# Altium PCB Sinistro_CLK_RevB.PcbDoc (part 5 of 6)
Units mil, origin at the board's own origin, x right, y up, seen from the top; angles counter-clockwise.
Board outline 5905.51 x 4330.71 mil, 10 copper layers (Top Layer (.GTL), MidLayer1 (*.G1), +12V (*.GP1), -12V (*.GP2), A & GND (*.GP3), Chassis E (*.GP4), +28V & VCC (*.GP5), MidLayer2 (*.G2), MidLayer3 (*.G3), Bottom Layer (.GBL)), stack 64.6 mil thick; 495 components, 327 nets, 1939 pads, 938 vias.
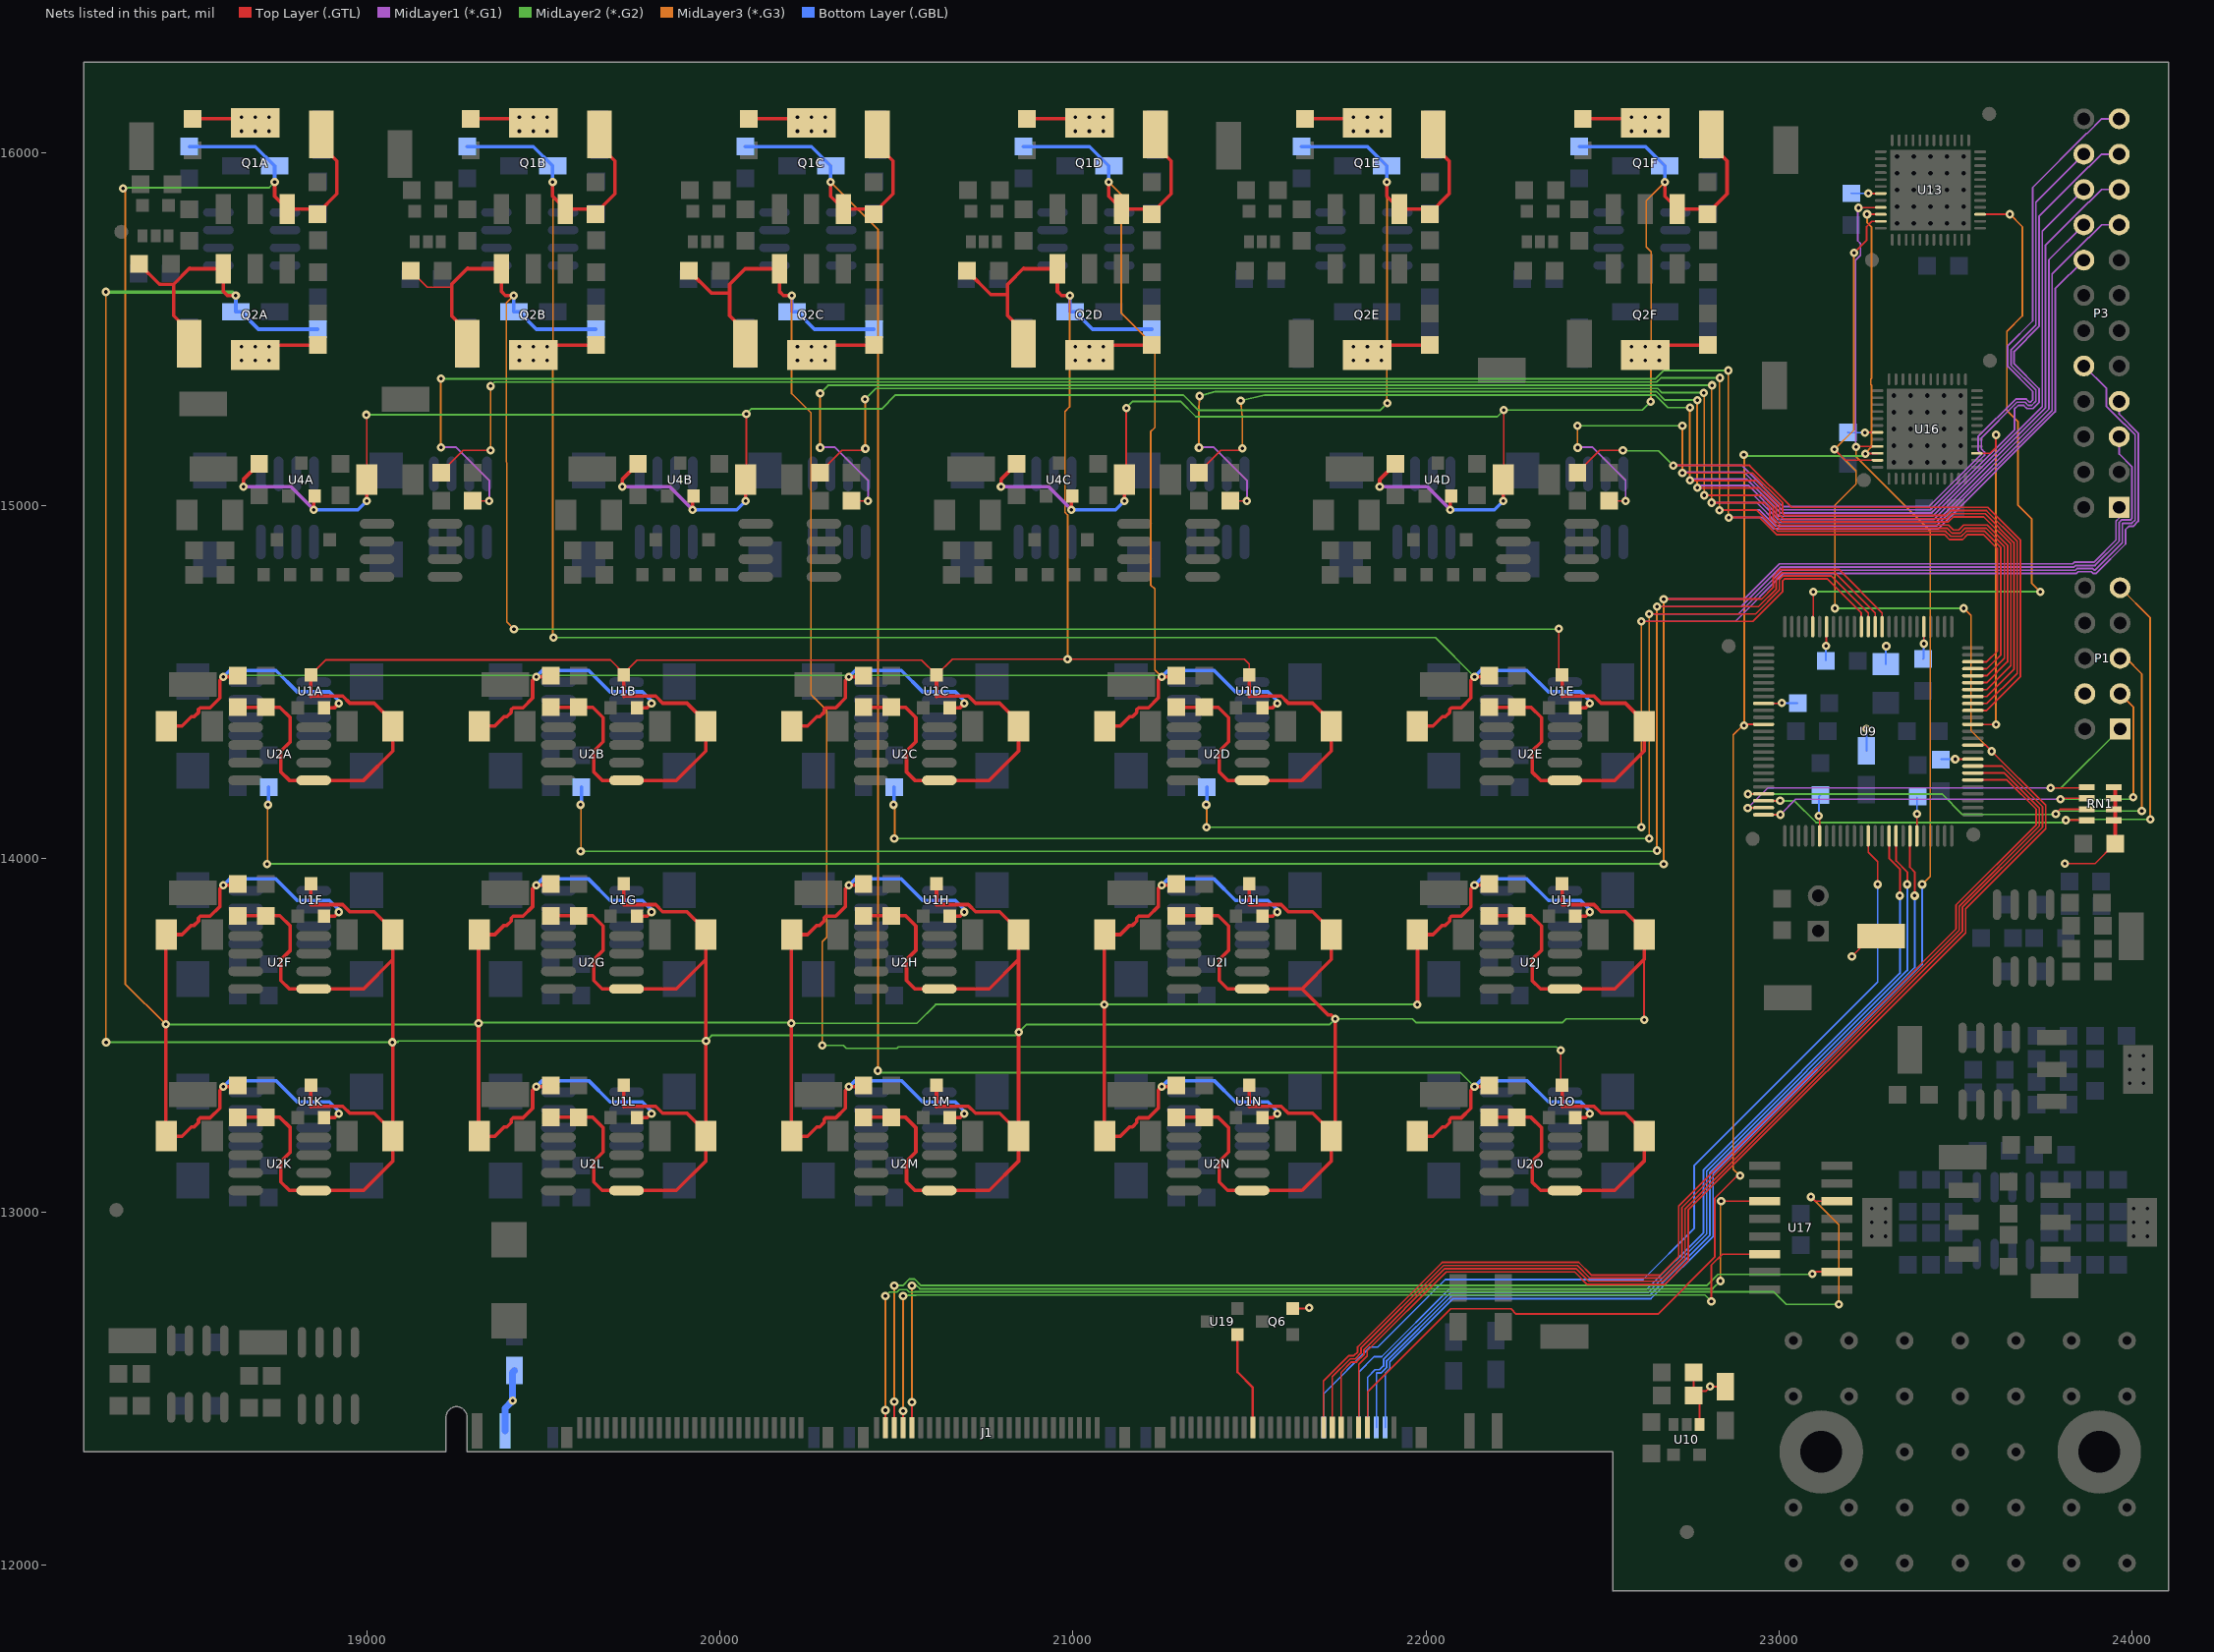
[diagram p13: the nets of this part, all layers, seen from the top]

## Via types
v1: diameter 24, hole 10, Top Layer (.GTL) to Bottom Layer (.GBL), 938 vias

## Nets (pads, with @x,y where several pads share a name; then routed paths per layer and width w, separated by ;. In a path a pad name is that pad's centre, name@x,y a point inside that pad or via, vN(x,y) a via of type N, cw(c..) or ccw(c..) an arc to the next point about the centre after c; other vN are vias at no path point) (continued)
PH_CLK12: P3.1 R1A.1 U9.86 | length 7167.4
  Top Layer (.GTL) w5: v1(22673,14735) 22949.91,14735 22983,14768.09 22983,14797.91 23004.09,14819 23168.78,14819 23291.78,14696 U9.86@23291.78,14656.89 U9.86@23291.78,14686.26
  MidLayer1 (*.G1) w5: v1(22673,14735) 22901.09,14735 23001.09,14835 23831.61,14835 23835.88,14839.27 23890.91,14839.27 23954,14902.36 23954,14955.94 23963,14964.94 P3.1@23963,14995
  MidLayer2 (*.G2) w5: v1(18718,13985) v1(22673,13985) ; v1(18720,14152.42) v1@18726,14152.42
  MidLayer3 (*.G3) w5: v1(18718,13985) 18719,13986 v1@18719,14153 ; v1(22673,13985) v1(22673,14735)
  Bottom Layer (.GBL) w10: v1(18720,14152.42) 18721.94,14154.35 R1A.1@18721.94,14202.44
PH_CLK13: P3.5 R1B.1 U9.87 | length 6416.4
  Top Layer (.GTL) w5: v1(22654,14714) 22941.64,14714 22992,14764.36 22992,14794.18 23007.82,14810 23158.09,14810 23272.09,14696 U9.87@23272.09,14656.89
  MidLayer1 (*.G1) w5: v1(22654,14714) 22892.82,14714 23004.82,14826 23835.34,14826 23839.61,14830.27 23894.64,14830.27 23963,14898.63 23963,14952.21 23969.76,14958.97 23995.22,14958.97 23999.03,14962.78 23999.03,15109.92 23963,15145.95 P3.5@23963,15195
  MidLayer2 (*.G2) w5: v1(19605.83,14152.42) v1@19611.83,14152.42 ; v1(19606,14021) v1@22656.66,14021
  MidLayer3 (*.G3) w5: v1(19606,14021) 19607,14022 v1@19607,14150 ; v1(22654,14022.75) v1(22654,14714)
  Bottom Layer (.GBL) w10: v1(19605.83,14152.42) 19607.76,14154.35 R1B.1@19607.76,14202.44
PH_CLK14: P3.10 R1C.1 U9.88 | length 5710.7
  Top Layer (.GTL) w5: v1(22632,14693) 22933.37,14693 23001,14760.63 23001,14790.46 23011.54,14801 23147.41,14801 23252.41,14696 U9.88@23252.41,14656.89
  MidLayer1 (*.G1) w5: v1(22632,14693) 22884.54,14693 23008.54,14817 23839.07,14817 23843.34,14821.27 23888.1,14821.27 23892.37,14817 23894.1,14817 23972,14894.9 23972,14948.48 23973.49,14949.97 23998.95,14949.97 24008.03,14959.05 24008.03,15200.92 23977.92,15231.03 23976.02,15231.03 23926.97,15280.08 23926.97,15331.03 P3.10@23863,15395
  MidLayer2 (*.G2) w5: v1(20491.65,14152.42) v1@20497.65,14152.42 ; v1(20494,14057) v1(22632,14057)
  MidLayer3 (*.G3) w5: v1(20494,14057) 20495,14058 v1@20495,14153 ; v1(22632,14057) v1(22632,14693)
  Bottom Layer (.GBL) w10: v1(20491.65,14152.42) 20493.59,14154.35 R1C.1@20493.59,14202.44
PH_CLK15: P3.7 R1D.1 U9.89 | length 4624.9
  Top Layer (.GTL) w5: v1(22610,14672) 22925.1,14672 23010,14756.9 23010,14786.73 23015.27,14792 23136.72,14792 23232.72,14696 U9.89@23232.72,14656.89
  MidLayer1 (*.G1) w5: v1(22610,14672) 22876.27,14672 23012.27,14808 23842.79,14808 23847.07,14812.27 23884.37,14812.27 23888.64,14808 23897.82,14808 23981,14891.18 23981,14932.02 23989.95,14940.97 24002.68,14940.97 24017.03,14955.32 24017.03,15204.65 23963,15258.68 P3.7@23963,15295
  MidLayer2 (*.G2) w5: v1(21377.48,14152.42) v1@21383.48,14152.42 ; v1(21378,14089) v1@22609,14089
  MidLayer3 (*.G3) w5: v1(21378,14089) 21379,14090 v1@21379,14160 ; v1(22610,14089) v1(22610,14672)
  Bottom Layer (.GBL) w10: v1(21377.48,14152.42) 21379.42,14154.35 R1D.1@21379.42,14202.44
PH_CLK16: P3.16 R6A.1 U9.73 | length 7268
  Top Layer (.GTL) w5: R6A.1@19300.4,15013.31 19300.71,15013 v1(19347,15013) ; v1@22858,14968 22860,14966 22944.9,14966 22992.9,14918 23467.91,14918 23482.15,14903.76 23519.85,14903.76 23534.09,14918 23578.46,14918 23618,14878.46 23618,14587.48 23588,14557.48 U9.73@23548.67,14557.48
  Top Layer (.GTL) w10: v1(19210,15165) v1@19210.4,15164.6
  MidLayer1 (*.G1) w5: v1(19210,15165) 19253,15165 19347,15071 v1(19347,15013) ; v1(22857,14966) 22952.9,14966 22984.9,14934 23450.26,14934 23781.97,15265.71 23781.97,15613.97 P3.16@23863,15695
  MidLayer2 (*.G2) w5: v1(19210,15359) 22650,15359 22673.49,15382.49 v1(22856,15382.49)
  MidLayer3 (*.G3) w5: v1(19210,15165) v1(19210,15359) ; v1(22856,15382.49) 22856,14967 v1(22857,14966)
PH_CLK17: P3.17 R3A.1 U9.72 | length 7196.5
  Top Layer (.GTL) w5: R3A.1@19210.4,15093.31 19273.09,15156 v1(19351,15156) ; v1@22831,14989 22833,14987 22936.63,14987 22996.63,14927 23471.64,14927 23485.88,14912.76 23516.12,14912.76 23530.36,14927 23582.18,14927 23628,14881.18 23628,14577.8 23588,14537.8 U9.72@23548.67,14537.8
  MidLayer1 (*.G1) w5: v1(22831,14987) 22944.63,14987 22988.63,14943 23446.53,14943 23772.97,15269.44 23772.97,15655.92 23876.02,15758.97 23877.92,15758.97 23913.95,15795 P3.17@23963,15795
  MidLayer2 (*.G2) w5: v1(19351,15338) 19362.49,15349.49 22653.22,15349.49 22665.22,15361.49 v1(22832,15361.49)
  MidLayer3 (*.G3) w5: v1(19351,15156) v1(19351,15338) ; v1(22831,14987) 22831,15360.49 v1(22832,15361.49)
PH_CLK18: P3.18 R6B.1 U9.71 | length 6314.9
  Top Layer (.GTL) w5: R6B.1@20373.24,15013.31 20373.54,15013 v1(20419.83,15013) ; v1@22809,15010 22811,15008 22958.18,15008 22974,14992.18 22974,14962.36 23000.36,14936 23475.37,14936 23489.61,14921.76 23512.39,14921.76 23526.63,14936 23585.91,14936 23638,14883.91 23638,14568.11 23588,14518.11 U9.71@23548.67,14518.11
  Top Layer (.GTL) w10: v1@20282.83,15165 v1@20283.24,15164.6 ; v1@20283.24,15163.24 v1(20284,15164)
  MidLayer1 (*.G1) w5: v1@20282.83,15165 20325.83,15165 20419.83,15071 v1(20419.83,15013) ; v1(22809,15008) 22936.36,15008 22992.36,14952 23442.8,14952 23763.97,15273.17 23763.97,15695.97 P3.18@23863,15795
  MidLayer2 (*.G2) w5: v1(20284,15318) 20306.49,15340.49 v1(22810,15340.49)
  MidLayer3 (*.G3) w5: v1(20284,15164) v1(20284,15318) ; v1(22809,15008) 22809,15339.49 v1(22810,15340.49)
PH_CLK19: P3.19 R3B.1 U9.70 | length 6241
  Top Layer (.GTL) w5: R3B.1@20283.24,15093.31 20345.93,15156 v1@20412,15156 ; v1@22788,15030 22789,15029 22949.91,15029 22983,14995.91 22983,14966.09 23004.09,14945 23479.1,14945 23493.34,14930.76 23508.66,14930.76 23522.9,14945 23589.64,14945 23647,14887.64 23647,14557.43 23588,14498.43 U9.70@23548.67,14498.43
  MidLayer1 (*.G1) w5: v1(22788,15029) 22928.09,15029 22996.09,14961 23439.07,14961 23754,15275.93 23754,15736.95 23876.02,15858.97 23877.92,15858.97 23913.95,15895 P3.19@23963,15895
  MidLayer2 (*.G2) w5: v1(20411,15301) 20441.49,15331.49 22656.46,15331.49 22668.46,15319.49 v1(22787,15319.49) v1@22788,15319.49
  MidLayer3 (*.G3) w5: v1(20411,15301) 20412,15300 v1(20412,15161) ; v1(22787,15319.49) 22788,15318.49 v1(22788,15029)
PH_CLK20: P3.20 R6C.1 U9.69 | length 5373.9
  Top Layer (.GTL) w5: R6C.1@21446.07,15013.31 21446.38,15013 v1(21492.67,15013) ; v1(22768,15050) 22941.64,15050 22992,14999.64 22992,14969.82 23007.82,14954 23479.58,14954 23493.34,14967.76 23579.61,14967.76 23656,14891.37 23656,14546.74 23588,14478.74 U9.69@23548.67,14478.74
  Top Layer (.GTL) w10: v1@21355.67,15165 v1@21356.07,15164.6 ; v1@21356.07,15163.24 v1(21356.83,15164)
  MidLayer1 (*.G1) w5: v1@21355.67,15165 21398.67,15165 21492.67,15071 v1(21492.67,15013) ; v1(22768,15050) 22774.91,15056.91 22912.91,15056.91 22999.82,14970 23435.35,14970 23745,15279.65 23745,15777 P3.20@23863,15895
  MidLayer2 (*.G2) w5: v1(21358.55,15309.89) 21402.49,15322.49 22652.73,15322.49 22676.73,15298.49 v1(22768,15298.49)
  MidLayer3 (*.G3) w5: v1@21357,15159 21357,15275 v1(21358.55,15309.89) ; v1(22768,15050) v1(22768,15298.49)
PH_CLK21: P3.21 R3C.1 U9.68 | length 5397.5
  Top Layer (.GTL) w5: R3C.1@21356.07,15093.31 21418.76,15156 21474,15156 v1(21480,15162) ; v1(22747,15071) 22933.37,15071 23001,15003.37 23001,14973.54 23011.54,14963 23475.85,14963 23489.61,14976.76 23583.33,14976.76 23665,14895.1 23665,14536.06 23588,14459.06 U9.68@23548.67,14459.06
  MidLayer1 (*.G1) w5: v1(22747,15071) 22751.5,15075.5 22907.04,15075.5 23003.54,14979 23431.62,14979 23666.5,15213.88 23666.5,15272.66 23677.34,15283.5 23692.66,15283.5 23701.66,15274.5 23719.23,15274.5 23736,15291.27 23736,15330.84 23665.5,15401.34 23665.5,15436.5 23736,15507 23736,15818.95 23876.02,15958.97 23877.92,15958.97 23913.95,15995 P3.21@23963,15995
  MidLayer2 (*.G2) w5: v1(21475,15297) 21542.49,15312.49 22650,15312.49 22685,15277.49 v1(22747,15277.49)
  MidLayer3 (*.G3) w5: v1(21475,15297) 21480,15250 v1(21480,15162) ; v1(22747,15071) v1(22747,15277.49)
PH_CLK22: P3.22 R6D.1 U9.67 | length 4411.6
  Top Layer (.GTL) w5: R6D.1@22518.91,15013.31 22519.21,15013 v1(22565.5,15013) ; v1(22726,15092.5) 22924.6,15092.5 23010,15007.1 23010,14977.27 23015.27,14972 23472.12,14972 23485.88,14985.76 23587.06,14985.76 23674,14898.82 23674,14525 23588.37,14439.37 U9.67@23548.67,14439.37
  Top Layer (.GTL) w10: v1@22428.5,15165 v1@22428.91,15164.6 ; v1@22428.91,15163.24 v1(22429.67,15164)
  MidLayer1 (*.G1) w5: v1@22428.5,15165 22471.5,15165 22565.5,15071 v1(22565.5,15013) ; v1(22726,15092.5) 22727.91,15094.41 22900.86,15094.41 23007.27,14988 23427.89,14988 23581.5,15141.61 23581.5,15151.34 23572.5,15160.34 23572.5,15191.39 23673.61,15292.5 23696.39,15292.5 23705.39,15283.5 23715.23,15283.5 23726.73,15295 23727,15295 23727,15327.11 23656.5,15397.61 23656.5,15440.23 23727,15510.73 23727,15859 P3.22@23863,15995
  MidLayer2 (*.G2) w5: v1(22429,15226) v1(22726,15226)
  MidLayer3 (*.G3) w5: v1@22429,15156 v1(22429,15226) ; v1(22726,15092.5) v1(22726,15226)
PH_CLK23: P3.23 R3D.1 U9.66 | length 4175.1
  Top Layer (.GTL) w5: R3D.1@22428.91,15093.31 22491.6,15156 v1(22557.67,15156) ; v1(22700,15113.5) 22916.32,15113.5 23035.06,14994.76 23590.79,14994.76 23683,14902.55 23683,14515 23587.69,14419.69 U9.66@23548.67,14419.69
  MidLayer1 (*.G1) w5: v1(22700,15113.5) 22894.5,15113.5 23011,14997 23424.16,14997 23572.5,15145.34 23572.5,15147.61 23563.5,15156.61 23563.5,15195.12 23669.88,15301.5 23700.12,15301.5 23709.12,15292.5 23711.5,15292.5 23718,15299 23718,15323.38 23647.5,15393.88 23647.5,15452.5 23718,15523 23718,15900.95 23870.55,16053.5 23872.45,16053.5 23913.95,16095 P3.23@23963,16095
  MidLayer2 (*.G2) w5: v1@22555,15155 22658.5,15155 v1(22700,15113.5)
Q1_CA: Q1A.4 R12A.1 | length 165.6
  Top Layer (.GTL) w10: R12A.1@18507.13,16095.32 Q1A.4@18672.76,16095.32
Q1_CB: Q1B.4 R12B.1 | length 165.6
  Top Layer (.GTL) w10: R12B.1@19294.54,16095.32 Q1B.4@19460.17,16095.32
Q1_CC: Q1C.4 R12C.1 | length 165.6
  Top Layer (.GTL) w10: R12C.1@20081.94,16095.32 Q1C.4@20247.57,16095.32
Q1_CD: Q1D.4 R12D.1 | length 165.6
  Top Layer (.GTL) w10: R12D.1@20869.34,16095.32 Q1D.4@21034.97,16095.32
Q1_CE: Q1E.4 R12E.1 | length 165.6
  Top Layer (.GTL) w10: R12E.1@21656.74,16095.32 Q1E.4@21822.37,16095.32
Q1_CF: Q1F.4 R12F.1 | length 165.6
  Top Layer (.GTL) w10: R12F.1@22444.14,16095.32 Q1F.4@22609.77,16095.32
Q2_CA: Q2A.4 R20A.2 | length 149.3
  Top Layer (.GTL) w10: Q2A.4@18712.13,15454.13 R20A.2@18861.46,15454.13
Q2_CB: Q2B.4 R20B.2 | length 149.3
  Top Layer (.GTL) w10: Q2B.4@19499.53,15454.13 R20B.2@19648.87,15454.13
Q2_CC: Q2C.4 R20C.2 | length 149.3
  Top Layer (.GTL) w10: Q2C.4@20286.94,15454.13 R20C.2@20436.27,15454.13
Q2_CD: Q2D.4 R20D.2 | length 149.3
  Top Layer (.GTL) w10: Q2D.4@21074.34,15454.13 R20D.2@21223.67,15454.13
Q2_CE: Q2E.4 R20E.2 | length 149.3
  Top Layer (.GTL) w10: Q2E.4@21861.74,15454.13 R20E.2@22011.07,15454.13
Q2_CF: Q2F.4 R20F.2 | length 149.3
  Top Layer (.GTL) w10: Q2F.4@22649.14,15454.13 R20F.2@22798.47,15454.13
RESET_N: J1.6 U9.44 | length 2650.8
  Top Layer (.GTL) w5: U9.44@23368.41,14062.26 U9.44@23370.52,14064.37 23370.52,13975.48 23384,13962 v1(23384,13895)
  Bottom Layer (.GBL) w5: J1.6@21859.5,12389.15 21859.5,12543.34 21859.66,12543.5 21872.39,12543.5 21888.5,12559.61 21888.5,12578.23 22073.27,12763 22633.27,12763 22804,12933.73 22804,13111.73 23384,13691.73 v1(23384,13895)
RG: J1.17 U9.56 | length 3221.4
  Top Layer (.GTL) w5: J1.17@21709.5,12389.15 21709.5,12520.46 21781.54,12592.5 21795.66,12592.5 21806.5,12603.34 21806.5,12617.46 22045.91,12856.87 22432.32,12856.87 22468.18,12821 22512,12821 22663.8,12821 22715.5,12872.7 22715.5,13015.68 23501,13801.18 23501,13869.18 23728,14096.18 23728,14139.82 23644.98,14222.84 U9.56@23548.67,14222.84
S1: J1.8 U9.42 | length 2657
  Top Layer (.GTL) w5: U9.42@23331.15,14064.37 23331.15,13993.85 23363,13962 v1(23363,13927)
  Bottom Layer (.GBL) w5: J1.8@21834.5,12389.15 21834.5,12531.07 21855.94,12552.5 21868.66,12552.5 21879.5,12563.34 21879.5,12581.96 22069.54,12772 22629.54,12772 22795,12937.46 22795,13115.46 23363,13683.46 v1(23363,13927)
S2: J1.10 U9.41 | length 2663
  Top Layer (.GTL) w5: U9.41@23311.46,14064.37 23311.46,14000.81 23342,13970.27 v1(23342,13895)
  Bottom Layer (.GBL) w5: J1.10@21809.5,12389.15 21809.5,12545.67 21853.34,12589.5 21874.32,12589.5 22065.82,12781 22625.82,12781 22786,12941.18 22786,13119.18 23342,13675.18 v1(23342,13895)
S3: J1.13 U9.58 | length 3246.8
  Top Layer (.GTL) w5: J1.13@21759.5,12389.15 21759.5,12545.01 21789,12574.5 21803.12,12574.5 21824.5,12595.88 21824.5,12610 22053.37,12838.87 22424.86,12838.87 22460.73,12803 22512,12803 22671.26,12803 22733.5,12865.24 22733.5,13008.23 23519,13793.73 23519,13861.73 23746,14088.73 23746,14147.27 23631.07,14262.21 U9.58@23548.67,14262.21
S_WIRED_1: J1.33 U19.1 | length 280.9
  Top Layer (.GTL) w7: U19.1@21466,12652 21466,12546 21509.5,12502.5 J1.33@21509.5,12389.15
SCLK: J1.7 U9.12 U13.10 U16.10 | length 4754.7
  Top Layer (.GTL) w5: J1.7@21834.5,12389.15 21834.5,12490.07 22069.44,12725 22240.56,12725 22255.22,12710.34 22656.61,12710.34 22817.5,12871.23 22817.5,13037.66 22881.84,13102 v1(22889,13102) ; v1(22901,14377) 22904.32,14380.32 U9.12@22956.15,14380.32 ; v1(23244,15147) 23277.89,15147 U16.10@23278.74,15147.85 ; v1(23249,15825) 23249.41,15824.59 U13.10@23287.74,15824.59
  MidLayer2 (*.G2) w5: v1(22900,15144) 22903.5,15140.5 23237.5,15140.5 v1(23244,15147)
  MidLayer3 (*.G3) w5: v1(22889,13102) 22870,13121 22870,14350 22897,14377 v1(22901,14377) 22901,15143 v1(22900,15144) ; v1(23244,15147) 23244,15148 23261.5,15165.5 23261.5,15340.34 23259.5,15342.34 23259.5,15357.66 23261.5,15359.66 23261.5,15789.5 23249,15802 v1(23249,15825)
SEL_MAX1_N: U9.96 U13.27 | length 1968.4
  Top Layer (.GTL) w5: U9.96@23094.93,14656.89 23097,14658.96 v1(23097,14756) ; U13.27@23569.24,15824.59 23652.59,15824.59 v1(23653,15825)
  MidLayer2 (*.G2) w5: v1(23097,14756) v1(23740,14756)
  MidLayer3 (*.G3) w5: v1(23653,15825) 23688.96,15789.04 23688.96,15536.96 23645,15493 23645,15269 23676,15238 23676,15001.27 23715,14962.27 23715,14781 v1(23740,14756)
SEL_MAX2_N: U9.64 U16.27 | length 981.4
  Top Layer (.GTL) w5: U9.64@23548.67,14380.32 23548.98,14380 v1(23614,14380) ; U16.27@23560.24,15147.85 23597.01,15147.85 23614,15164.84 v1(23614,15200)
  MidLayer3 (*.G3) w5: v1(23614,14380) v1(23614,15200)
SG: J1.15 U9.57 | length 3234.1
  Top Layer (.GTL) w5: J1.15@21734.5,12389.15 21734.5,12532.73 21785.27,12583.5 21799.39,12583.5 21815.5,12599.61 21815.5,12613.73 22049.64,12847.87 22428.59,12847.87 22464.46,12812 22512,12812 22667.53,12812 22724.5,12868.97 22724.5,13011.96 23510,13797.46 23510,13865.46 23737,14092.46 23737,14143.54 23638.02,14242.52 U9.57@23548.67,14242.52
SIMO: J1.9 U9.61 U13.11 U16.11 | length 5409.2
  Top Layer (.GTL) w5: J1.9@21809.5,12389.15 21809.5,12568.16 21833.5,12592.15 21833.5,12606.27 22057.09,12829.87 22421.13,12829.87 22457,12794 22512,12794 22674.99,12794 22742.5,12861.51 22742.5,13004.5 23528,13790 23528,13858 23755,14085 23755,14151 v1(23602,14304) 23584.74,14321.26 U9.61@23548.67,14321.26 ; v1(23157,15159) 23187.83,15128.17 U16.11@23278.74,15128.17 ; v1(23212,15716) 23248,15752 23248,15790 23262.91,15804.91 U13.11@23287.74,15804.91
  MidLayer2 (*.G2) w5: v1(23158,14709) v1(23523,14709)
  MidLayer3 (*.G3) w5: v1(23158,14709) 23158,15001 23218,15061 23218,15098 v1(23157,15159) 23212,15214 v1(23212,15716) ; v1(23523,14709) 23543.5,14688.5 23543.5,14362.5 v1(23602,14304)
SOMI: J1.4 U13.9 U16.9 | length 4650.8
  Top Layer (.GTL) w5: v1@23218.54,15167.54 U16.9@23278.74,15167.54 ; v1(23225.16,15843) 23225.66,15843.5 23286.97,15843.5 U13.9@23287.74,15844.28
  MidLayer1 (*.G1) w5: v1@23216.5,15167.5 23216.5,15694.34 23230.5,15708.34 23230.5,15742 23222.73,15749.77 23222.73,15835.23 v1@23230.5,15843 ; v1(23225.16,15843) 23229.16,15847 23230,15847 v1@23230.5,15846.5
  MidLayer2 (*.G2) w5: v1@23224.16,15844 v1(23225.16,15843)
  MidLayer3 (*.G3) w5: v1(23218,15166) 23218,15138.48 23427.91,14928.57 23427.91,13949.91 23420,13942 v1(23405,13927)
  Bottom Layer (.GBL) w5: J1.4@21884.5,12389.15 21884.5,12542.89 21897.5,12555.88 21897.5,12574.5 22077,12754 22637,12754 22813,12930 22813,13108 23405,13700 v1(23405,13927)
TCK: P1.1 RN1.1 U9.24 | length 1292.4
  Top Layer (.GTL) w5: v1(22911,14143) 22912.1,14144.1 U9.24@22956.15,14144.1 ; v1(23769,14200) RN1.1@23868.23,14200
  MidLayer1 (*.G1) w5: v1(22911,14143) 22968,14200 v1(23769,14200)
  MidLayer2 (*.G2) w5: v1(23769,14200) 23798.47,14200 P1.1@23965.72,14367.24
TDI: P1.9 RN1.7 U9.23 | length 1874.1
  Top Layer (.GTL) w5: U9.23@22956.15,14163.78 v1(23002.78,14163.78) v1@23003,14164 ; v1(23812,14109) RN1.7@23870.16,14109
  MidLayer2 (*.G2) w5: v1(23002.78,14163.78) 23043.1,14163.78 23104.75,14102.13 23805.13,14102.13 v1(23812,14109) 23814,14111 v1(24051,14111)
  MidLayer3 (*.G3) w5: P1.9@23965.72,14767.24 24051,14681.96 v1(24051,14111)
TDO: P1.3 RN1.3 U9.25 | length 1451.9
  Top Layer (.GTL) w5: U9.25@22956.15,14124.41 v1(23003.59,14124.41) v1@23004,14124 ; v1(23797,14168) 23800.21,14171.21 RN1.3@23870.94,14171.21
  MidLayer1 (*.G1) w5: v1(23003.59,14124.41) 23047.18,14168 v1(23797,14168)
  MidLayer2 (*.G2) w5: v1(23797,14168) 23997,14168 v1(24003,14174)
  MidLayer3 (*.G3) w5: v1(23965.72,14467.24) 24003,14429.96 v1(24003,14174)
TG: J1.18 U9.38 | length 2676.7
  Top Layer (.GTL) w5: U9.38@23252.41,14064.37 23252.41,14017.58 23279,13990.99 v1(23279,13927)
  Bottom Layer (.GBL) w5: J1.18@21709.5,12389.15 21709.5,12483.85 21842.15,12616.5 21863.13,12616.5 22054.63,12808 22614.63,12808 22759,12952.37 22759,13130.37 23279,13650.37 v1(23279,13927)
TMS: P1.5 RN1.5 U9.22 | length 1749.3
  Top Layer (.GTL) w5: v1(22912,14183) 22912.47,14183.47 U9.22@22956.15,14183.47 ; v1(23783,14127) 23795.72,14139.72 RN1.5@23870.94,14139.72
  MidLayer2 (*.G2) w5: v1(22912,14183) 23461,14183 23519,14125 23782,14125 v1(23784,14127) 23792,14135 v1(24027,14135)
  MidLayer3 (*.G3) w5: v1(23783,14127) v1(23784,14127) ; P1.5@23965.72,14567.24 23982.76,14567.24 24027,14523 v1(24027,14135)
VCC: C7.1 C12.2 C16.2 C17.2 C18.2 C19.2 C20.2 C21.2 C23.2 C24.2 C32.1 C34.2 C36.2 C55.1 J1.PC06 L5.2 P1.4 Q6.2 RN1.2 RN1.4 RN1.6 RN1.8 TP19.1 U9.9 U9.31 U9.45 U9.59 U9.80 U9.94 U10.1 U13.7 U16.7 | length 1823.3
  Top Layer (.GTL) w5: Q6.2@21622,12726 21667,12726 v1(21669,12728) ; C12.2@22758,12545 C16.2@22758,12489 ; U10.1@22775,12398 22775,12463 C16.2@22758,12480 C16.2@22758,12489 ; C7.1@22848,12505 v1(22805,12505) 22792,12492 22761,12492 C16.2@22758,12489 ; U9.9@22956.15,14439.37 23006.15,14439.37 v1(23007.41,14440.63) ; v1(23112.41,14120.63) 23114.61,14118.42 U9.31@23114.61,14064.37 ; v1(23133.41,14602.63) U9.94@23133.41,14656 ; v1(23206,13723) 23291,13808 TP19.1@23300,13808 ; v1(23243,15206.26) 23243.65,15206.91 U16.7@23278.74,15206.91 ; v1(23253,15884) 23253.35,15883.65 U13.7@23287.74,15883.65 ; U9.45@23390.2,14064.37 23390.2,14126.43 v1(23390.41,14126.63) ; v1(23409.41,14608.63) 23409.89,14609.11 U9.80@23409.89,14656.89 ; v1(23498.41,14281.63) 23498.67,14281.89 U9.59@23548.67,14281.89 ; v1(23809,13986) 23894.84,13986 23951.55,14042.71 C17.2@23952,14042.71
  Top Layer (.GTL) w10: RN1.2@23947.71,14202.71 23952,14198.42 C17.2@23952,14042.71
  Bottom Layer (.GBL) w5: v1(23007.41,14440.63) C19.2@23052.41,14440.63 ; v1(23112.41,14120.63) 23112.41,14175.63 C18.2@23117.41,14180.63 ; C23.2@23132.41,14560.63 23132.41,14601.63 v1(23133.41,14602.63) ; C36.2@23195,15207.26 23196,15206.26 v1(23243,15206.26) ; C34.2@23204,15884 v1(23253,15884) ; C32.1@23247.41,14305.63 v1(23247.41,14367.63) ; L5.2@23302.41,14550.63 23302.41,14600.63 v1(23303.41,14601.63) ; v1(23390.41,14126.63) C20.2@23390.41,14173.63 ; C21.2@23407.41,14565.63 23409.41,14567.63 v1(23409.41,14608.63) ; C24.2@23458.41,14281.63 v1(23498.41,14281.63)
  Bottom Layer (.GBL) w20: J1.PC06@19391.5,12379.15 19391.5,12443.5 v1(19413,12465) 19413,12545 C55.1@19418,12550
VDD: J1.101 U17.14 | length 3513.6
  Top Layer (.GTL) w5: v1(20469,12438) 20469.16,12437.84 J1.101@20469.16,12388.09 ; v1(23090,13042) 23102,13030 U17.14@23163.67,13030
  MidLayer2 (*.G2) w5: v1(20469,12761) 20480.5,12772.5 20501.66,12772.5 20508.66,12779.5 20529.34,12779.5 20536.34,12772.5 20551.66,12772.5 20552.16,12773 22985,12773 23020,12738 v1(23169,12738)
  MidLayer3 (*.G3) w5: v1(20469,12438) v1(20469,12761) ; v1(23090,13042) 23169,12963 v1(23169,12738)
VOD: J1.95 U17.3 | length 3055.6
  Top Layer (.GTL) w5: v1(20544,12461) 20544.16,12460.84 J1.95@20544.16,12388.09 ; v1(22836,13030) U17.3@22958.95,13030
  MidLayer2 (*.G2) w5: v1(20544,12791) 20557.44,12791 20566.44,12782 22812,12782 v1(22834,12804)
  MidLayer3 (*.G3) w5: v1(20544,12461) v1(20544,12791) ; v1(22834,12804) 22834,13028 v1(22836,13030)
VOG: J1.99 U17.10 | length 3104.1
  Top Layer (.GTL) w5: v1(20494,12462) 20494.16,12461.84 J1.99@20494.16,12388.09 ; v1(23094,12824) 23100,12830 U17.10@23163.67,12830
  MidLayer2 (*.G2) w5: v1(20494,12791) 20517.84,12791 20536.34,12809.5 20551.66,12809.5 20570.16,12791 22794.84,12791 22826.34,12822.5 23092.5,12822.5 v1(23094,12824)
  MidLayer3 (*.G3) w5: v1(20494,12462) v1(20494,12791)
VRD: J1.97 U17.6 | length 2937.5
  Top Layer (.GTL) w5: v1(20519,12436) 20519.16,12435.84 J1.97@20519.16,12388.09 ; v1(22808,12746) 22808,12849 22839,12880 U17.6@22958.95,12880
  MidLayer2 (*.G2) w5: v1(20519,12761) 20521.5,12763.5 20555.39,12763.5 20555.89,12764 22790,12764 v1(22808,12746)
  MidLayer3 (*.G3) w5: v1(20519,12436) v1(20519,12761)
VREFHI1: C4F.2 C4G.2 C4H.2 C4I.2 C4J.2 C4K.2 C4L.2 C4M.2 C4N.2 C13A.1 L1F.1 L1G.1 L1H.1 L1I.1 L1J.1 L1K.1 L1L.1 L1M.1 L1N.1 Q1A.3 R7A.2 R13A.2 TP1A.1 U1F.2 U1G.2 U1H.2 U1I.2 U1J.2 U1K.2 U1L.2 U1M.2 U1N.2 | length 16155.3
  Top Layer (.GTL) w10: L1F.1@18430.87,13783.18 v1(18430.87,13530.49) 18430.87,13215.63 L1K.1@18432.53,13213.98 18476.8,13213.98 18503.12,13240.3 18511.19,13240.3 18523.53,13252.63 18523.53,13260.7 18528.8,13265.98 18556.49,13265.98 18583.87,13293.36 18583.87,13343.66 v1(18594.04,13353.82) ; L1F.1@18430.87,13786.5 18432.53,13784.84 18476.8,13784.84 18503.12,13811.16 18511.19,13811.16 18523.53,13823.5 18523.53,13831.57 18528.8,13836.84 18556.49,13836.84 18583.87,13864.22 18583.87,13914.52 v1@18593.98,13924.64 ; v1(18594.04,13353.82) v1(18594.04,13353.82) ; v1(18594.04,13924.69) v1@18593.98,13924.64 ; C4K.2@18635.32,13357.4 18631.69,13353.77 v1(18594.04,13353.82) ; C4F.2@18635.32,13928.27 18631.69,13924.64 v1@18593.98,13924.64 ; v1(18739.3,15915.59) 18739.3,15875.24 Q1A.3@18774.85,15839.68 18849.93,15839.69 18861.46,15828.15 18915.6,15882.28 18915.6,15975.51 18871.31,16019.8 TP1A.1@18871.31,16050.32 ; U1K.2@18879.42,13266.14 18908.94,13266.14 v1(18920.76,13277.95) ; U1F.2@18879.42,13837.01 18908.94,13837.01 v1(18920.76,13848.82) ; L1G.1@19316.7,13783.18 v1(19316.7,13534) 19316.7,13215.63 L1L.1@19318.35,13213.98 19362.63,13213.98 19388.95,13240.3 19397.02,13240.3 19409.35,13252.63 19409.35,13260.7 19414.63,13265.98 19442.31,13265.98 19469.7,13293.36 19469.7,13343.66 v1(19479.86,13353.82) ; L1G.1@19316.7,13786.5 19318.35,13784.84 19362.63,13784.84 19388.95,13811.16 19397.02,13811.16 19409.35,13823.5 19409.35,13831.57 19414.63,13836.84 19442.31,13836.84 19469.7,13864.22 19469.7,13914.52 v1@19479.81,13924.64 ; v1(19479.86,13353.82) v1(19479.86,13353.82) ; v1(19479.86,13924.69) v1@19479.81,13924.64 ; C4L.2@19521.15,13357.4 19517.52,13353.77 v1(19479.86,13353.82) ; C4G.2@19521.15,13928.27 19517.52,13924.64 v1@19479.81,13924.64 ; U1L.2@19765.24,13266.14 19794.77,13266.14 v1(19806.58,13277.95) ; U1G.2@19765.24,13837.01 19794.77,13837.01 v1(19806.58,13848.82) ; L1H.1@20202.52,13783.18 v1(20202.52,13534) 20202.52,13215.63 L1M.1@20204.18,13213.98 20248.45,13213.98 20274.78,13240.3 20282.85,13240.3 20295.18,13252.63 20295.18,13260.7 20300.45,13265.98 20328.14,13265.98 20355.52,13293.36 20355.52,13343.66 v1@20365.64,13353.77 ; L1H.1@20202.52,13786.5 20204.18,13784.84 20248.45,13784.84 20274.78,13811.16 20282.85,13811.16 20295.18,13823.5 20295.18,13831.57 20300.45,13836.84 20328.14,13836.84 20355.52,13864.22 20355.52,13914.52 v1@20365.64,13924.64 ; v1(20365.69,13353.82) v1@20365.64,13353.77 ; v1(20365.69,13924.69) v1@20365.64,13924.64 ; C4M.2@20406.98,13357.4 20403.35,13353.77 v1@20365.64,13353.77 ; C4H.2@20406.98,13928.27 20403.35,13924.64 v1@20365.64,13924.64 ; U1M.2@20651.07,13266.14 20680.6,13266.14 v1(20692.41,13277.95) ; U1H.2@20651.07,13837.01 20680.6,13837.01 v1(20692.41,13848.82) ; v1(21251.52,13353.82) v1@21251.46,13353.77 ; v1(21251.52,13924.69) v1@21251.46,13924.64 ; C4N.2@21292.8,13357.4 21289.17,13353.77 v1@21251.46,13353.77 ; C4I.2@21292.8,13928.27 21289.17,13924.64 v1@21251.46,13924.64 ; U1N.2@21536.9,13266.14 21566.42,13266.14 v1(21578.24,13277.95) ; U1I.2@21536.9,13837.01 21566.42,13837.01 v1(21578.24,13848.82) ; L1J.1@21974.18,13786.5 L1J.1@21975.84,13784.84 ; v1(21975,13587) 21975.84,13587.84 L1J.1@21975.84,13784.84 ; v1(22137.34,13924.69) v1@22137.29,13924.64 ; C4J.2@22178.63,13928.27 22175,13924.64 v1@22137.29,13924.64 ; U1J.2@22422.72,13837.01 22452.25,13837.01 v1(22464.06,13848.82) ; v1@21251.46,13353.77 21241.35,13343.66 21241.35,13293.36 21213.97,13265.98 21186.28,13265.98 21181.01,13260.7 21181.01,13252.63 21168.67,13240.3 21160.6,13240.3 21134.28,13213.98 L1N.1@21090.01,13213.98 21088.35,13215.63 21088.35,13784.84 21088.35,13786.5 21090.01,13784.84 21134.28,13784.84 21160.6,13811.16 21168.67,13811.16 21181.01,13823.5 21181.01,13831.57 21186.28,13836.84 21213.97,13836.84 21241.35,13864.22 21241.35,13914.52 v1@21251.46,13924.64 ; L1J.1@21975.84,13784.84 22020.11,13784.84 22046.43,13811.16 22054.5,13811.16 22066.84,13823.5 22066.84,13831.57 22072.11,13836.84 22099.8,13836.84 22127.18,13864.22 22127.18,13914.52 v1@22137.29,13924.64
  MidLayer1 (*.G1) w10: v1(18594.04,13353.82) v1@18594.49,13353.36 ; v1(18594.04,13924.69) v1@18594.49,13924.23 ; v1(19479.86,13353.82) v1@19480.32,13353.36 ; v1(19479.86,13924.69) v1@19480.32,13924.23 ; v1(20365.69,13353.82) v1@20366.15,13353.36 ; v1(20365.69,13924.69) v1@20366.15,13924.23 ; v1(21251.52,13353.82) v1@21251.97,13353.36 ; v1(21251.52,13924.69) v1@21251.97,13924.23 ; v1(22137.34,13924.69) v1@22137.8,13924.23
  MidLayer2 (*.G2) w5: v1(18310,15898) 18311.93,15899.93 18723.63,15899.93 v1(18739.3,15915.59) ; v1(18430.87,13530.49) 19313.19,13530.49 v1(19316.7,13534) 19316.7,13536 20200.52,13536 v1(20202.52,13534) 20558,13534 20611,13587 v1(21088.35,13587) v1(21975,13587)
  MidLayer3 (*.G3) w5: v1(18310,15898) 18316,15892 18316,13645.36 v1(18430.87,13530.49)
  Bottom Layer (.GBL) w10: R7A.2@18497.29,16016.58 18684.46,16016.58 C13A.1@18739.3,15961.73 v1(18739.3,15915.59) ; v1(18594.04,13353.82) 18611.7,13371.49 18742.58,13371.49 18803.09,13310.97 18894.76,13310.97 18920.76,13284.97 v1(18920.76,13277.95) ; v1(18594.04,13924.69) 18611.7,13942.35 18742.58,13942.35 18803.09,13881.83 18894.76,13881.83 18920.76,13855.83 v1(18920.76,13848.82) ; v1(19479.86,13353.82) 19497.53,13371.49 19628.4,13371.49 19688.92,13310.97 19780.58,13310.97 19806.58,13284.97 v1(19806.58,13277.95) ; v1(19479.86,13924.69) 19497.53,13942.35 19628.4,13942.35 19688.92,13881.83 19780.58,13881.83 19806.58,13855.83 v1(19806.58,13848.82) ; v1(20365.69,13353.82) 20383.35,13371.49 20514.23,13371.49 20574.75,13310.97 20666.41,13310.97 20692.41,13284.97 v1(20692.41,13277.95) ; v1(20365.69,13924.69) 20383.35,13942.35 20514.23,13942.35 20574.75,13881.83 20666.41,13881.83 20692.41,13855.83 v1(20692.41,13848.82) ; v1(21251.52,13353.82) 21269.18,13371.49 21400.06,13371.49 21460.57,13310.97 21552.24,13310.97 21578.24,13284.97 v1(21578.24,13277.95) ; v1(21251.52,13924.69) 21269.18,13942.35 21400.06,13942.35 21460.57,13881.83 21552.24,13881.83 21578.24,13855.83 v1(21578.24,13848.82) ; v1(22137.34,13924.69) 22155.01,13942.35 22285.88,13942.35 22346.4,13881.83 22438.07,13881.83 22464.06,13855.83 v1(22464.06,13848.82)
VREFHI2: C4E.2 C13B.1 L1E.1 Q1B.3 R7B.2 R13B.2 TP1B.1 U1E.2 | length 5423.6
  Top Layer (.GTL) w10: v1(19526.7,15915.59) 19526.7,15875.24 Q1B.3@19562.25,15839.68 19637.33,15839.69 19648.87,15828.15 19703,15882.28 19703,15975.51 19658.71,16019.8 TP1B.1@19658.71,16050.32 ; L1E.1@21974.18,14377.05 L1E.1@21975.84,14375.39 22020.11,14375.39 22046.43,14401.72 22054.5,14401.72 22066.84,14414.05 22066.84,14422.12 22072.11,14427.39 22099.8,14427.39 22127.18,14454.78 22127.18,14505.07 v1(22137.34,14515.24) ; v1(22137.34,14515.24) v1(22137.34,14515.24) ; C4E.2@22178.63,14518.82 22175,14515.19 v1(22137.34,14515.24) ; U1E.2@22422.72,14427.56 22452.25,14427.56 v1(22464.06,14439.37)
  MidLayer1 (*.G1) w10: v1(22137.34,14515.24) v1@22137.8,14514.78
  MidLayer2 (*.G2) w5: v1(19529,14626) 22026.58,14626 v1(22137.34,14515.24)
  MidLayer3 (*.G3) w5: v1(19526.7,15915.59) 19527.57,15914.72 19527.57,15403.72 19527,15403.15 19527,14628 v1(19529,14626)
  Bottom Layer (.GBL) w10: R7B.2@19284.69,16016.58 19471.86,16016.58 C13B.1@19526.7,15961.73 v1(19526.7,15915.59) ; v1(22137.34,14515.24) 22155.01,14532.9 22285.88,14532.9 22346.4,14472.39 22438.07,14472.39 22464.06,14446.39 v1(22464.06,14439.37)
VREFHI3: C4O.2 C13C.1 L1O.1 Q1C.3 R7C.2 R13C.2 TP1C.1 U1O.2 | length 5760.4
  Top Layer (.GTL) w10: v1(20314.1,15915.59) 20314.1,15875.24 Q1C.3@20349.65,15839.68 20424.73,15839.69 20436.27,15828.15 20490.4,15882.28 20490.4,15975.51 20446.11,16019.8 TP1C.1@20446.11,16050.32 ; L1O.1@21974.18,13215.63 L1O.1@21975.84,13213.98 22020.11,13213.98 22046.43,13240.3 22054.5,13240.3 22066.84,13252.63 22066.84,13260.7 22072.11,13265.98 22099.8,13265.98 22127.18,13293.36 22127.18,13343.66 v1(22137.34,13353.82) ; v1(22137.34,13353.82) v1(22137.34,13353.82) ; C4O.2@22178.63,13357.4 22175,13353.77 v1(22137.34,13353.82) ; U1O.2@22422.73,13266.14 22452.25,13266.14 v1(22464.06,13277.95)
  MidLayer1 (*.G1) w10: v1(22137.34,13353.82) v1@22137.8,13353.36
  MidLayer2 (*.G2) w5: v1(20447.73,13399.49) 20447.73,13400.73 20448,13401 20455,13394 22097.17,13394 v1(22137.34,13353.82)
  MidLayer3 (*.G3) w5: v1(20314.1,15915.59) 20447.73,15781.96 v1(20447.73,13399.49)
  Bottom Layer (.GBL) w10: R7C.2@20072.09,16016.58 20259.26,16016.58 C13C.1@20314.1,15961.73 v1(20314.1,15915.59) ; v1(22137.34,13353.82) 22155.01,13371.49 22285.88,13371.49 22346.4,13310.97 22438.07,13310.97 22464.06,13284.97 v1(22464.06,13277.95)
VREFHI4: C4A.2 C4B.2 C4C.2 C4D.2 C13D.1 L1A.1 L1B.1 L1C.1 L1D.1 Q1D.3 R7D.2 R13D.2 TP1D.1 U1A.2 U1B.2 U1C.2 U1D.2 | length 7767.9
  Top Layer (.GTL) w10: L1A.1@18430.87,14377.05 L1A.1@18432.53,14375.39 18476.8,14375.39 18503.12,14401.72 18511.19,14401.72 18523.53,14414.05 18523.53,14422.12 18528.8,14427.39 18556.49,14427.39 18583.87,14454.78 18583.87,14505.07 v1(18594.04,14515.24) ; v1(18594.04,14515.24) v1(18594.04,14515.24) ; C4A.2@18635.32,14518.82 18631.69,14515.19 v1(18594.04,14515.24) ; U1A.2@18879.42,14427.56 18908.94,14427.56 v1(18920.76,14439.37) ; L1B.1@19316.7,14377.05 L1B.1@19318.35,14375.39 19362.63,14375.39 19388.95,14401.72 19397.02,14401.72 19409.35,14414.05 19409.35,14422.12 19414.63,14427.39 19442.31,14427.39 19469.7,14454.78 19469.7,14505.07 v1(19479.86,14515.24) ; v1(19479.86,14515.24) v1(19479.86,14515.24) ; C4B.2@19521.15,14518.82 19517.52,14515.19 v1(19479.86,14515.24) ; U1B.2@19765.24,14427.56 19794.77,14427.56 v1(19806.58,14439.37) ; L1C.1@20202.52,14377.05 L1C.1@20204.18,14375.39 20248.45,14375.39 20274.78,14401.72 20282.85,14401.72 20295.18,14414.05 20295.18,14422.12 20300.45,14427.39 20328.14,14427.39 20355.52,14454.78 20355.52,14505.07 v1@20365.64,14515.19 ; v1(20365.69,14515.24) v1@20365.64,14515.19 ; C4C.2@20406.98,14518.82 20403.35,14515.19 v1@20365.64,14515.19 ; U1C.2@20651.07,14427.56 20680.6,14427.56 v1(20692.41,14439.37) ; L1D.1@21088.35,14377.05 L1D.1@21090.01,14375.39 21134.28,14375.39 21160.6,14401.72 21168.67,14401.72 21181.01,14414.05 21181.01,14422.12 21186.28,14427.39 21213.97,14427.39 21241.35,14454.78 21241.35,14505.07 v1@21251.46,14515.19 ; v1(21101.5,15915.59) 21101.5,15875.24 Q1D.3@21137.06,15839.68 21212.13,15839.69 21223.67,15828.15 21277.8,15882.28 21277.8,15975.51 21233.51,16019.8 TP1D.1@21233.51,16050.32 ; v1(21251.52,14515.24) v1@21251.46,14515.19 ; C4D.2@21292.8,14518.82 21289.17,14515.19 v1@21251.46,14515.19 ; U1D.2@21536.9,14427.56 21566.42,14427.56 v1(21578.24,14439.37)
  MidLayer1 (*.G1) w10: v1(18594.04,14515.24) v1@18594.49,14514.78 ; v1(19479.86,14515.24) v1@19480.32,14514.78 ; v1(20365.69,14515.24) v1@20366.15,14514.78 ; v1(21251.52,14515.24) v1@21251.97,14514.78
  MidLayer2 (*.G2) w5: v1@18598.61,14518.89 v1@21247.86,14518.89
  MidLayer3 (*.G3) w5: v1(21101.5,15915.59) 21137,15880.09 21137,15544.88 21232,15449.88 21232,15221.07 21220,15209.07 21220,14775.46 21232,14763.46 21232,14534.65 21232.1,14534.65 v1(21251.52,14515.24)
  Bottom Layer (.GBL) w10: v1(18594.04,14515.24) 18611.7,14532.9 18742.58,14532.9 18803.09,14472.39 18894.76,14472.39 18920.76,14446.39 v1(18920.76,14439.37) ; v1(19479.86,14515.24) 19497.53,14532.9 19628.4,14532.9 19688.92,14472.39 19780.58,14472.39 19806.58,14446.39 v1(19806.58,14439.37) ; v1(20365.69,14515.24) 20383.35,14532.9 20514.23,14532.9 20574.75,14472.39 20666.41,14472.39 20692.41,14446.39 v1(20692.41,14439.37) ; R7D.2@20859.5,16016.58 21046.66,16016.58 C13D.1@21101.5,15961.73 v1(21101.5,15915.59) ; v1(21251.52,14515.24) 21269.18,14532.9 21400.06,14532.9 21460.57,14472.39 21552.24,14472.39 21578.24,14446.39 v1(21578.24,14439.37)
VREFHI5: C6A.2 C6B.2 C13E.1 L3A.1 L3B.1 Q1E.3 R7E.2 R13E.2 TP1E.1 U4A.2 U4B.2 | length 5835.3
  Top Layer (.GTL) w5: v1(18999,15257) 19000.4,15255.6 L3A.1@19000.4,15073.31 ; L3B.1@20075,15075.07 v1(20075,15259)
  Top Layer (.GTL) w10: v1(18650.4,15053.31) 18650.4,15073.31 C6A.2@18695.4,15118.31 ; v1(18850.4,14988.31) 18850.4,15024.64 U4A.2@18852.8,15027.05 ; v1(19000.4,15013.31) L3A.1@19000.4,15073.31 ; v1(19723.24,15053.31) 19723.24,15073.31 C6B.2@19768.24,15118.31 ; v1(19923.24,14988.31) 19923.24,15024.64 U4B.2@19925.64,15027.05 ; v1(20073.24,15013.31) L3B.1@20073.24,15073.31 ; v1(21888.91,15915.59) 21888.91,15875.24 Q1E.3@21924.46,15839.68 21999.54,15839.69 22011.07,15828.15 22065.21,15882.28 22065.21,15975.51 22020.91,16019.8 TP1E.1@22020.91,16050.32
  MidLayer1 (*.G1) w10: v1(18650.4,15053.31) 18785.4,15053.31 v1(18850.4,14988.31) ; v1(19723.24,15053.31) 19858.24,15053.31 v1(19923.24,14988.31)
  MidLayer2 (*.G2) w5: v1(18999,15257) 20072,15257 v1@20075,15260 ; v1(20075,15259) v1@20075,15260 ; v1(21890,15290) 21869.5,15269.5 21355.77,15269.5 21312.27,15313 20497.73,15313 20458.23,15273.5 20088.5,15273.5 v1@20075,15260
  MidLayer3 (*.G3) w5: v1(21888.91,15915.59) 21889.78,15914.72 21889.78,15403.72 21889,15402.94 21889,15290 v1(21890,15290) v1@21890,15289
  Bottom Layer (.GBL) w10: v1(18850.4,14988.31) 18975.4,14988.31 v1(19000.4,15013.31) ; v1(19923.24,14988.31) 20048.24,14988.31 v1(20073.24,15013.31) ; R7E.2@21646.9,16016.58 21834.06,16016.58 C13E.1@21888.91,15961.73 v1(21888.91,15915.59)
VREFHI6: C6C.2 C6D.2 C13F.1 L3C.1 L3D.1 Q1F.3 R7F.2 R13F.2 TP1F.1 U4C.2 U4D.2 | length 4474.3
  Top Layer (.GTL) w5: L3C.1@21151,15078.24 v1(21151,15276) ; L3D.1@22220,15074.4 v1(22220,15270)
  Top Layer (.GTL) w10: v1(20796.07,15053.31) 20796.07,15073.31 C6C.2@20841.07,15118.31 ; v1(20996.07,14988.31) 20996.07,15024.64 U4C.2@20998.47,15027.05 ; v1(21146.07,15013.31) L3C.1@21146.07,15073.31 ; v1(21868.91,15053.31) 21868.91,15073.31 C6D.2@21913.91,15118.31 ; v1(22068.91,14988.31) 22068.91,15024.64 U4D.2@22071.31,15027.05 ; v1(22218.91,15013.31) L3D.1@22218.91,15073.31 ; v1(22676.31,15915.59) 22676.31,15875.24 Q1F.3@22711.86,15839.68 22786.94,15839.69 22798.47,15828.15 22852.61,15882.28 22852.61,15975.51 22808.31,16019.8 TP1F.1@22808.31,16050.32
  MidLayer1 (*.G1) w10: v1(20796.07,15053.31) 20931.07,15053.31 v1(20996.07,14988.31) ; v1(21868.91,15053.31) 22003.91,15053.31 v1(22068.91,14988.31)
  MidLayer2 (*.G2) w5: v1@21153,15274 v1(21151,15276) 21151,15277 21169,15295 21304.82,15295 21348.32,15251.5 22201.5,15251.5 v1(22220,15270) 22220.5,15270.5 22612.74,15270.5 v1(22635.73,15293.49)
  MidLayer3 (*.G3) w5: v1@22636,15295 22635.73,15294.73 v1(22635.73,15293.49) 22637,15294.76 22637,15402.91 22637.81,15403.72 22637.81,15718.28 22623.48,15732.61 22623.48,15862.76 v1(22676.31,15915.59)
  Bottom Layer (.GBL) w10: v1(20996.07,14988.31) 21121.07,14988.31 v1(21146.07,15013.31) ; v1(22068.91,14988.31) 22193.91,14988.31 v1(22218.91,15013.31) ; R7F.2@22434.3,16016.58 22621.46,16016.58 C13F.1@22676.31,15961.73 v1(22676.31,15915.59)
VREFLO1: C2F.1 C2G.1 C2H.1 C2I.1 C2J.1 C2K.1 C2L.1 C2M.1 C2N.1 C4F.1 C4G.1 C4H.1 C4I.1 C4J.1 C4K.1 C4L.1 C4M.1 C4N.1 C14A.2 L2F.1 L2G.1 L2H.1 L2I.1 L2J.1 L2K.1 L2L.1 L2M.1 L2N.1 Q2A.3 R9A.1 R17A.2 TP2A.1 U1F.3 U1G.3 U1H.3 U1I.3 U1J.3 U1K.3 U1L.3 U1M.3 U1N.3 U2F.5 U2G.5 U2H.5 U2I.5 U2J.5 U2K.5 U2L.5 U2M.5 U2N.5 | length 20007
  Top Layer (.GTL) w5: v1(22617.65,13543.35) 22617.65,13714.2 L2J.1@22617.65,13784.84
  Top Layer (.GTL) w10: R17A.2@18355,15684 18412.62,15626.38 18453,15626.38 ; TP2A.1@18497.29,15459.76 18497.29,15493.23 18453,15537.52 18453,15626.38 ; 18498.7,15672.09 18453,15626.38 ; 18500.4,15670.39 Q2A.3@18593.75,15670.4 18593.75,15606.42 18605.56,15594.61 v1(18629.18,15594.61) ; C4K.1@18635.32,13267.4 C2K.1@18714.06,13267.4 18754.21,13267.4 18783.57,13238.04 18783.57,13169.57 18757,13143 18757,13084 18780.76,13060.24 U2K.5@18849.89,13060.24 18991.24,13060.24 19074.34,13143.34 L2K.1@19074.34,13213.98 ; C4F.1@18635.32,13838.27 C2F.1@18714.06,13838.27 18754.21,13838.27 18783.57,13808.9 18783.57,13740.44 18757,13713.87 18757,13654.87 18780.76,13631.1 U2F.5@18849.89,13631.1 18991.24,13631.1 19074.34,13714.2 ; U1K.3@18842.02,13358.66 18842.02,13297.72 18843.25,13298.95 18932.24,13298.95 18952.25,13278.94 19021.15,13278.94 19074.34,13225.75 L2K.1@19074.34,13213.98 ; U1F.3@18842.02,13929.53 18842.02,13868.58 18843.25,13869.82 18932.24,13869.82 18952.25,13849.8 19021.15,13849.8 19074.34,13796.61 19074.34,13714.2 ; v1(19073,13480) v1@19074.34,13481.34 ; L2F.1@19074.34,13784.84 19074.34,13714.2 ; C4L.1@19521.15,13267.4 C2L.1@19599.89,13267.4 19640.04,13267.4 19669.4,13238.04 19669.4,13169.57 19642.83,13143 19642.83,13084 19666.59,13060.24 U2L.5@19735.72,13060.24 19877.06,13060.24 19960.17,13143.34 L2L.1@19960.17,13213.98 ; C4G.1@19521.15,13838.27 C2G.1@19599.89,13838.27 19640.04,13838.27 19669.4,13808.9 19669.4,13740.44 19642.83,13713.87 19642.83,13654.87 19666.59,13631.1 U2G.5@19735.72,13631.1 19877.06,13631.1 19960.17,13714.2 ; U1L.3@19727.84,13358.66 19727.84,13297.72 19729.08,13298.95 19818.06,13298.95 19838.08,13278.94 19906.98,13278.94 19960.17,13225.75 L2L.1@19960.17,13213.98 ; U1G.3@19727.84,13929.53 19727.84,13868.58 19729.08,13869.82 19818.06,13869.82 19838.08,13849.8 19906.98,13849.8 19960.17,13796.61 19960.17,13714.2 ; L2G.1@19960.17,13784.84 19960.17,13714.2 ; v1(19961,13484) v1@19960.17,13484.84 ; C4M.1@20406.98,13267.4 C2M.1@20485.72,13267.4 20525.86,13267.4 20555.22,13238.04 20555.22,13169.57 20528.65,13143 20528.65,13084 20552.42,13060.24 U2M.5@20621.54,13060.24 20762.89,13060.24 20845.99,13143.34 L2M.1@20845.99,13213.98 ; C4H.1@20406.98,13838.27 C2H.1@20485.72,13838.27 20525.86,13838.27 20555.22,13808.9 20555.22,13740.44 20528.65,13713.87 20528.65,13654.87 20552.42,13631.1 U2H.5@20621.54,13631.1 20762.89,13631.1 20845.99,13714.2 ; U1M.3@20613.67,13358.66 20613.67,13297.72 20614.91,13298.95 20703.89,13298.95 20723.91,13278.94 20792.8,13278.94 20845.99,13225.75 L2M.1@20845.99,13213.98 ; U1H.3@20613.67,13929.53 20613.67,13868.58 20614.91,13869.82 20703.89,13869.82 20723.91,13849.8 20792.8,13849.8 20845.99,13796.61 20845.99,13714.2 ; L2H.1@20845.99,13784.84 20845.99,13714.2 ; v1(20847.14,13509.14) 20846.79,13509.49 v1@20845.99,13509.49 ; C4N.1@21292.8,13267.4 C2N.1@21371.54,13267.4 21411.69,13267.4 21441.05,13238.04 21441.05,13169.57 21414.48,13143 21414.48,13084 21438.24,13060.24 U2N.5@21507.37,13060.24 21648.72,13060.24 21731.82,13143.34 L2N.1@21731.82,13213.98 21731.82,13225.75 21678.63,13278.94 21609.73,13278.94 21589.72,13298.95 21500.73,13298.95 21499.5,13297.72 U1N.3@21499.5,13358.66 ; C4I.1@21292.8,13838.27 C2I.1@21371.54,13838.27 21411.69,13838.27 21441.05,13808.9 21441.05,13740.44 21414.48,13713.87 21414.48,13654.87 21438.24,13631.1 U2I.5@21507.37,13631.1 21648.72,13631.1 ; U1I.3@21499.5,13929.53 21499.5,13868.58 21500.73,13869.82 21589.72,13869.82 21609.73,13849.8 21678.63,13849.8 21731.82,13796.61 21731.82,13784.84 21731.82,13714.2 21648.72,13631.1 ; L2N.1@21743,13225.16 v1(21743,13546) 21731.82,13557.18 21722.64,13557.18 21648.72,13631.1 ; C4J.1@22178.63,13838.27 C2J.1@22257.37,13838.27 22297.52,13838.27 22326.88,13808.9 22326.88,13740.44 22300.31,13713.87 22300.31,13654.87 22324.07,13631.1 U2J.5@22393.2,13631.1 22534.54,13631.1 22617.65,13714.2 22617.65,13796.61 22564.46,13849.8 22495.56,13849.8 22475.54,13869.82 22386.56,13869.82 22385.32,13868.58 U1J.3@22385.32,13929.53 ; L2K.1@19074.34,13213.98 v1@19074.34,13481.34 ; v1@19074.34,13481.34 19074.34,13714.2 ; L2L.1@19960.17,13213.98 v1@19960.17,13484.84 ; v1@19960.17,13484.84 19960.17,13714.2 ; L2M.1@20845.99,13213.98 v1@20845.99,13509.49 ; v1@20845.99,13509.49 20845.99,13714.2
  MidLayer2 (*.G2) w5: v1(18262,13480) v1(19073,13480) 19088.73,13480 ; 19088.73,13480.27 19088.73,13483.49 v1@19960.49,13483.49 ; v1(19961,13484) 19976.5,13499.5 20837.5,13499.5 20868.5,13530.5 21727.5,13530.5 v1(21743,13546) 21961,13546 21971,13536 22387,13536 22397,13546 22615,13546 v1(22617.65,13543.35)
  MidLayer2 (*.G2) w10: v1@18262.2,15603.8 18619.99,15603.8 v1(18629.18,15594.61)
  MidLayer3 (*.G3) w5: v1@18261,13481 v1(18261,15605)
  Bottom Layer (.GBL) w10: v1@18629.3,15594.49 C14A.2@18629.3,15548.35 18643.94,15548.35 18693.16,15499.13 R9A.1@18861.46,15499.13
VREFLO2: C2E.1 C4E.1 C14B.2 L2E.1 Q2B.3 R9B.1 R17B.2 TP2B.1 U1E.3 U2E.5 | length 6016.9
  Top Layer (.GTL) w5: R17B.2@19125,15665 19171.57,15618.43 19240.4,15618.43 ; U1E.3@22376,14529.4 v1(22376,14651)
  Top Layer (.GTL) w10: TP2B.1@19284.69,15459.76 19284.69,15493.23 19240.4,15537.52 19240.4,15618.43 19240.4,15626.38 19286.11,15672.09 ; 19287.8,15670.39 Q2B.3@19381.15,15670.4 19381.15,15606.42 19392.96,15594.61 v1(19416.58,15594.61) ; C4E.1@22178.63,14428.82 C2E.1@22257.37,14428.82 22297.52,14428.82 22326.88,14399.46 22326.88,14330.99 22300.31,14304.42 22300.31,14245.42 22324.07,14221.65 U2E.5@22393.2,14221.66 22534.54,14221.65 22617.65,14304.76 L2E.1@22617.65,14375.39 22617.65,14387.16 22564.46,14440.35 22495.56,14440.35 22475.54,14460.37 22386.56,14460.37 22385.32,14459.13 U1E.3@22385.32,14520.08
  MidLayer2 (*.G2) w5: v1(19417,14650) 22374,14650 22375,14651 v1(22376,14651)
  MidLayer3 (*.G3) w5: v1(19416.58,15594.61) 19395.6,15573.62 19396.72,14670.23 v1(19417,14650)
  Bottom Layer (.GBL) w10: v1@19416.7,15594.49 C14B.2@19416.7,15548.35 19431.35,15548.35 19480.56,15499.13 R9B.1@19648.87,15499.13
VREFLO3: C2O.1 C4O.1 C14C.2 L2O.1 Q2C.3 R9C.1 R17C.2 TP2C.1 U1O.3 U2O.5 | length 6353.6
  Top Layer (.GTL) w5: U1O.3@22381.73,13362.25 v1(22381.73,13457.49)
  Top Layer (.GTL) w10: R17C.2@19912.4,15665 19975.4,15602 20027.8,15602 ; TP2C.1@20072.09,15459.76 20072.09,15493.23 20027.8,15537.52 20027.8,15602 ; v1(20203.98,15594.61) 20180.36,15594.61 20168.55,15606.42 Q2C.3@20168.55,15670.4 20071.82,15670.39 20027.8,15626.38 20027.8,15602 ; C4O.1@22178.63,13267.4 C2O.1@22257.37,13267.4 22297.52,13267.4 22326.88,13238.04 22326.88,13169.57 22300.31,13143 22300.31,13084 22324.07,13060.24 22534.54,13060.24 22617.65,13143.34 22617.65,13225.75 22564.46,13278.94 22495.56,13278.94 22475.54,13298.95 22386.56,13298.95 22385.32,13297.72 U1O.3@22385.32,13358.66
  MidLayer2 (*.G2) w5: v1(20290,13471) 20350,13471 20358.5,13462.5 20501.66,13462.5 20506.16,13467 22369,13467 v1@22381.73,13454.27 ; v1(22381.73,13457.49) v1@22381.73,13454.27 ; v1@22382,13454 v1@22381.73,13454.27
  MidLayer3 (*.G3) w5: v1(20203.98,15594.61) 20203.23,15593.85 20203.23,15317.23 20257.84,15262.63 20257.84,14465.19 20302.45,14420.58 20302.45,13777.18 20290,13764.73 v1(20290,13471)
  Bottom Layer (.GBL) w10: v1(20203.98,15594.61) 20204.1,15594.49 C14C.2@20204.1,15548.35 20218.75,15548.35 20267.96,15499.13 R9C.1@20436.27,15499.13
VREFLO4: C2A.1 C2B.1 C2C.1 C2D.1 C4A.1 C4B.1 C4C.1 C4D.1 C14D.2 L2A.1 L2B.1 L2C.1 L2D.1 Q2D.3 R9D.1 R17D.2 TP2D.1 U1A.3 U1B.3 U1C.3 U1D.3 U2A.5 U2B.5 U2C.5 U2D.5 | length 9083.7
  Top Layer (.GTL) w5: U1A.3@18842.01,14520.08 18884.94,14563 19689.58,14563 19727.84,14524.74 19765.11,14562 20571.75,14562 U1C.3@20613.67,14520.08 20658.59,14565 v1(20985,14565) 21485,14565 21499.5,14550.5 U1D.3@21499.5,14520.08
  Top Layer (.GTL) w10: C4A.1@18635.32,14428.82 C2A.1@18714.06,14428.82 18754.21,14428.82 18783.57,14399.46 18783.57,14330.99 18757,14304.42 18757,14245.42 18780.76,14221.65 U2A.5@18849.89,14221.65 18991.24,14221.65 19074.34,14304.76 L2A.1@19074.34,14375.39 19074.34,14387.16 19021.15,14440.35 18952.25,14440.35 18932.24,14460.37 18843.25,14460.37 18842.02,14459.13 U1A.3@18842.01,14520.08 ; C4B.1@19521.15,14428.82 C2B.1@19599.89,14428.82 19640.04,14428.82 19669.4,14399.46 19669.4,14330.99 19642.83,14304.42 19642.83,14245.42 19666.59,14221.65 U2B.5@19735.72,14221.66 19877.06,14221.65 19960.17,14304.76 L2B.1@19960.17,14375.39 19960.17,14387.16 19906.98,14440.35 19838.08,14440.35 19818.06,14460.37 19729.08,14460.37 19727.84,14459.13 U1B.3@19727.84,14520.08 ; C4C.1@20406.98,14428.82 C2C.1@20485.72,14428.82 20525.86,14428.82 20555.22,14399.46 20555.22,14330.99 20528.65,14304.42 20528.65,14245.42 20552.42,14221.65 U2C.5@20621.54,14221.65 20762.89,14221.65 20845.99,14304.76 L2C.1@20845.99,14375.39 20845.99,14387.16 20792.8,14440.35 20723.91,14440.35 20703.89,14460.37 20614.91,14460.37 20613.67,14459.13 U1C.3@20613.67,14520.08 ; R17D.2@20699.8,15665 20767.8,15597 20815.21,15597 ; TP2D.1@20859.5,15459.76 20859.5,15493.23 20815.21,15537.52 20815.21,15597 ; v1(20991.39,15594.61) 20967.76,15594.61 20955.95,15606.42 Q2D.3@20955.95,15670.4 20862.6,15670.39 20860.91,15672.09 20815.21,15626.38 20815.21,15597 ; C4D.1@21292.8,14428.82 C2D.1@21371.54,14428.82 21411.69,14428.82 21441.05,14399.46 21441.05,14330.99 21414.48,14304.42 21414.48,14245.42 21438.24,14221.65 U2D.5@21507.37,14221.65 21648.72,14221.65 21731.82,14304.76 L2D.1@21731.82,14375.39 21731.82,14387.16 21678.63,14440.35 21609.73,14440.35 21589.72,14460.37 21500.73,14460.37 21499.5,14459.13 U1D.3@21499.5,14520.08
  MidLayer3 (*.G3) w5: v1(20985,14565) 20985,14973.22 20977.57,14980.64 20977.57,15266.57 20990.63,15279.63 20990.63,15593.85 v1(20991.39,15594.61)
  Bottom Layer (.GBL) w10: v1(20991.39,15594.61) 20991.5,15594.49 C14D.2@20991.5,15548.35 21006.15,15548.35 21055.36,15499.13 R9D.1@21223.67,15499.13